# Altium PCB PCB1.PcbDoc
Units mm, origin at the board's own origin, x right, y up, seen from the top; angles counter-clockwise.
Board outline 39.12 x 20 mm, 2 copper layers (Top Layer, Bottom Layer); 40 components, 0 nets, 201 pads, 57 vias.
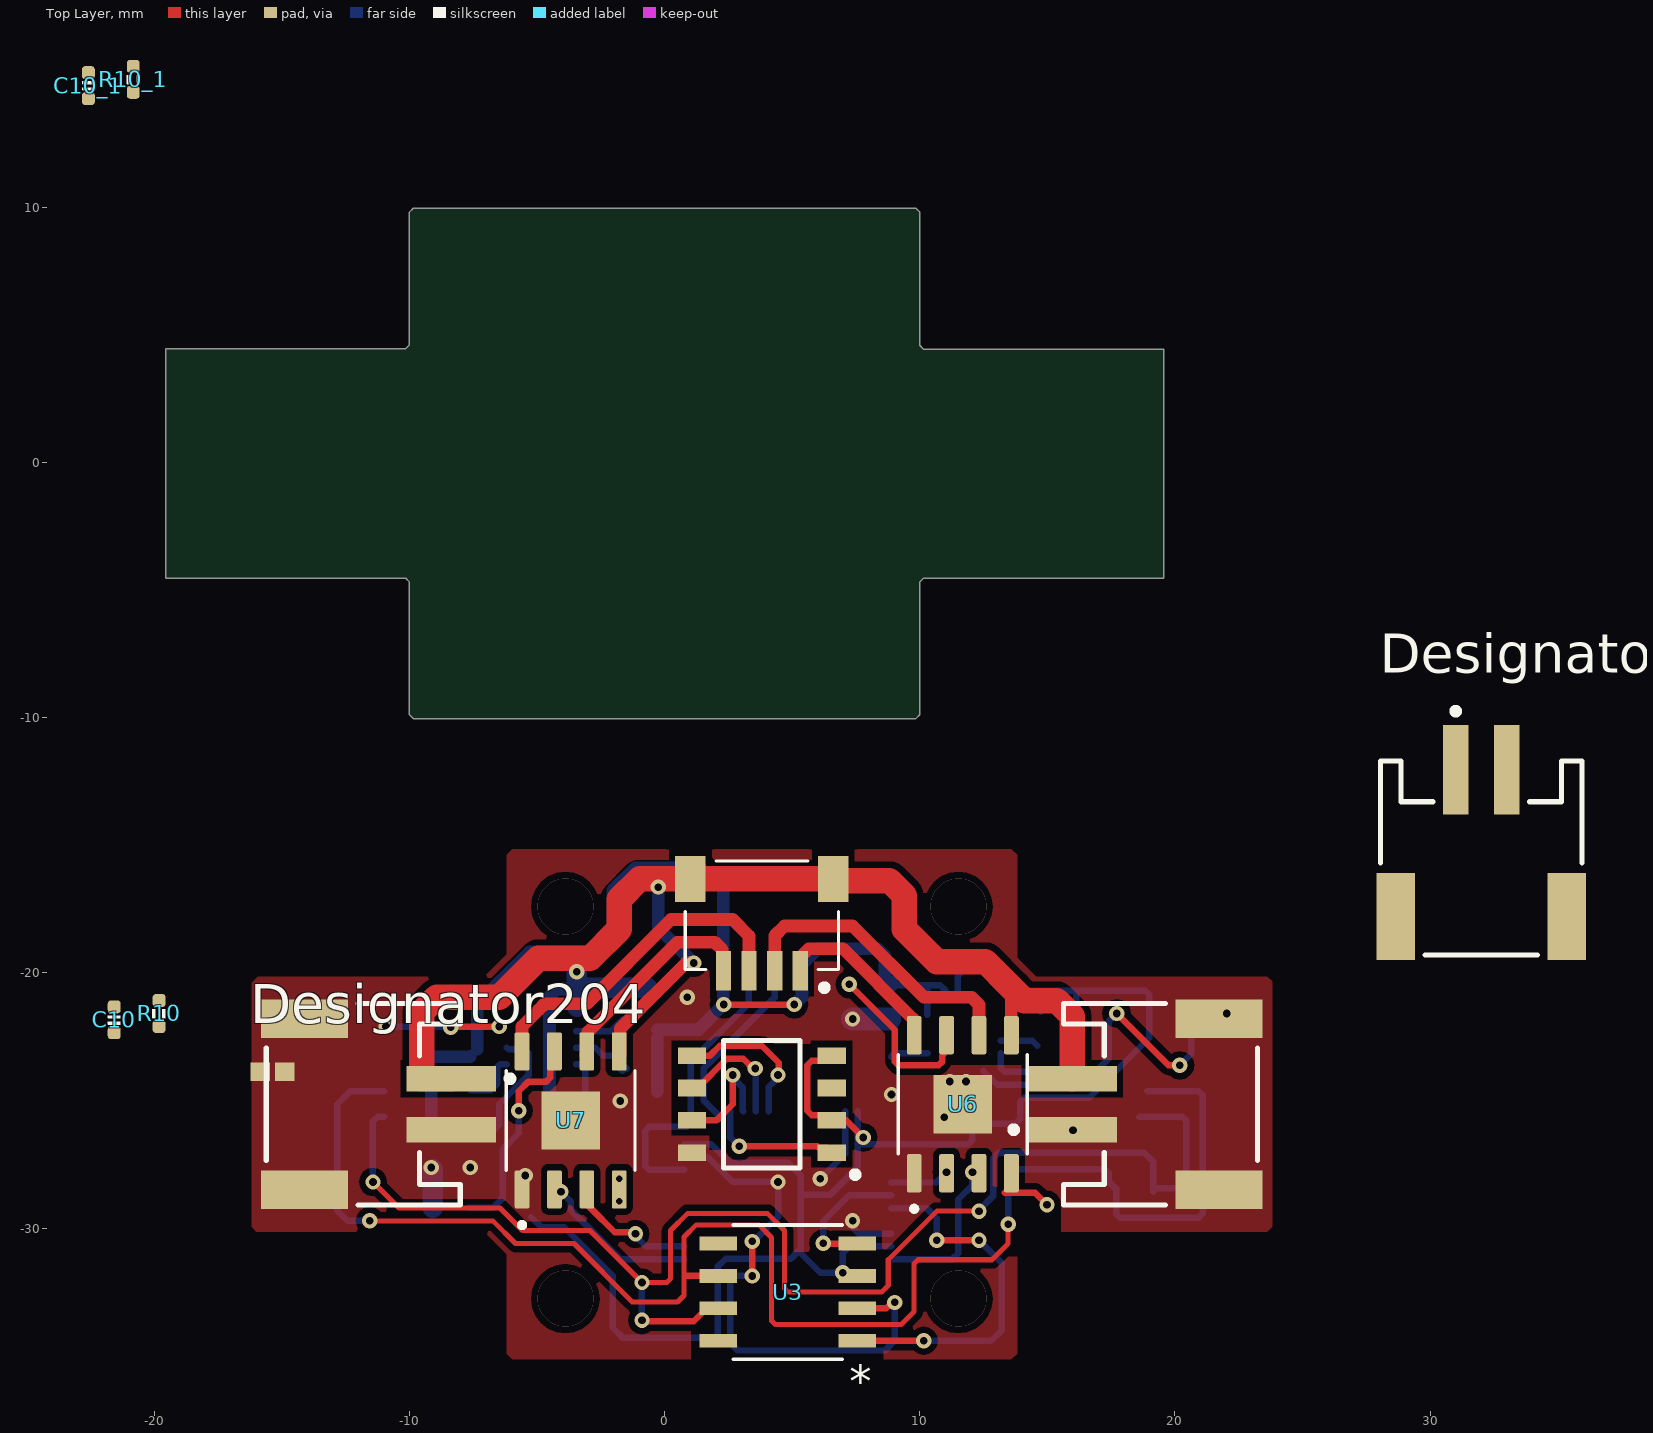
[diagram p0: Top Layer view]
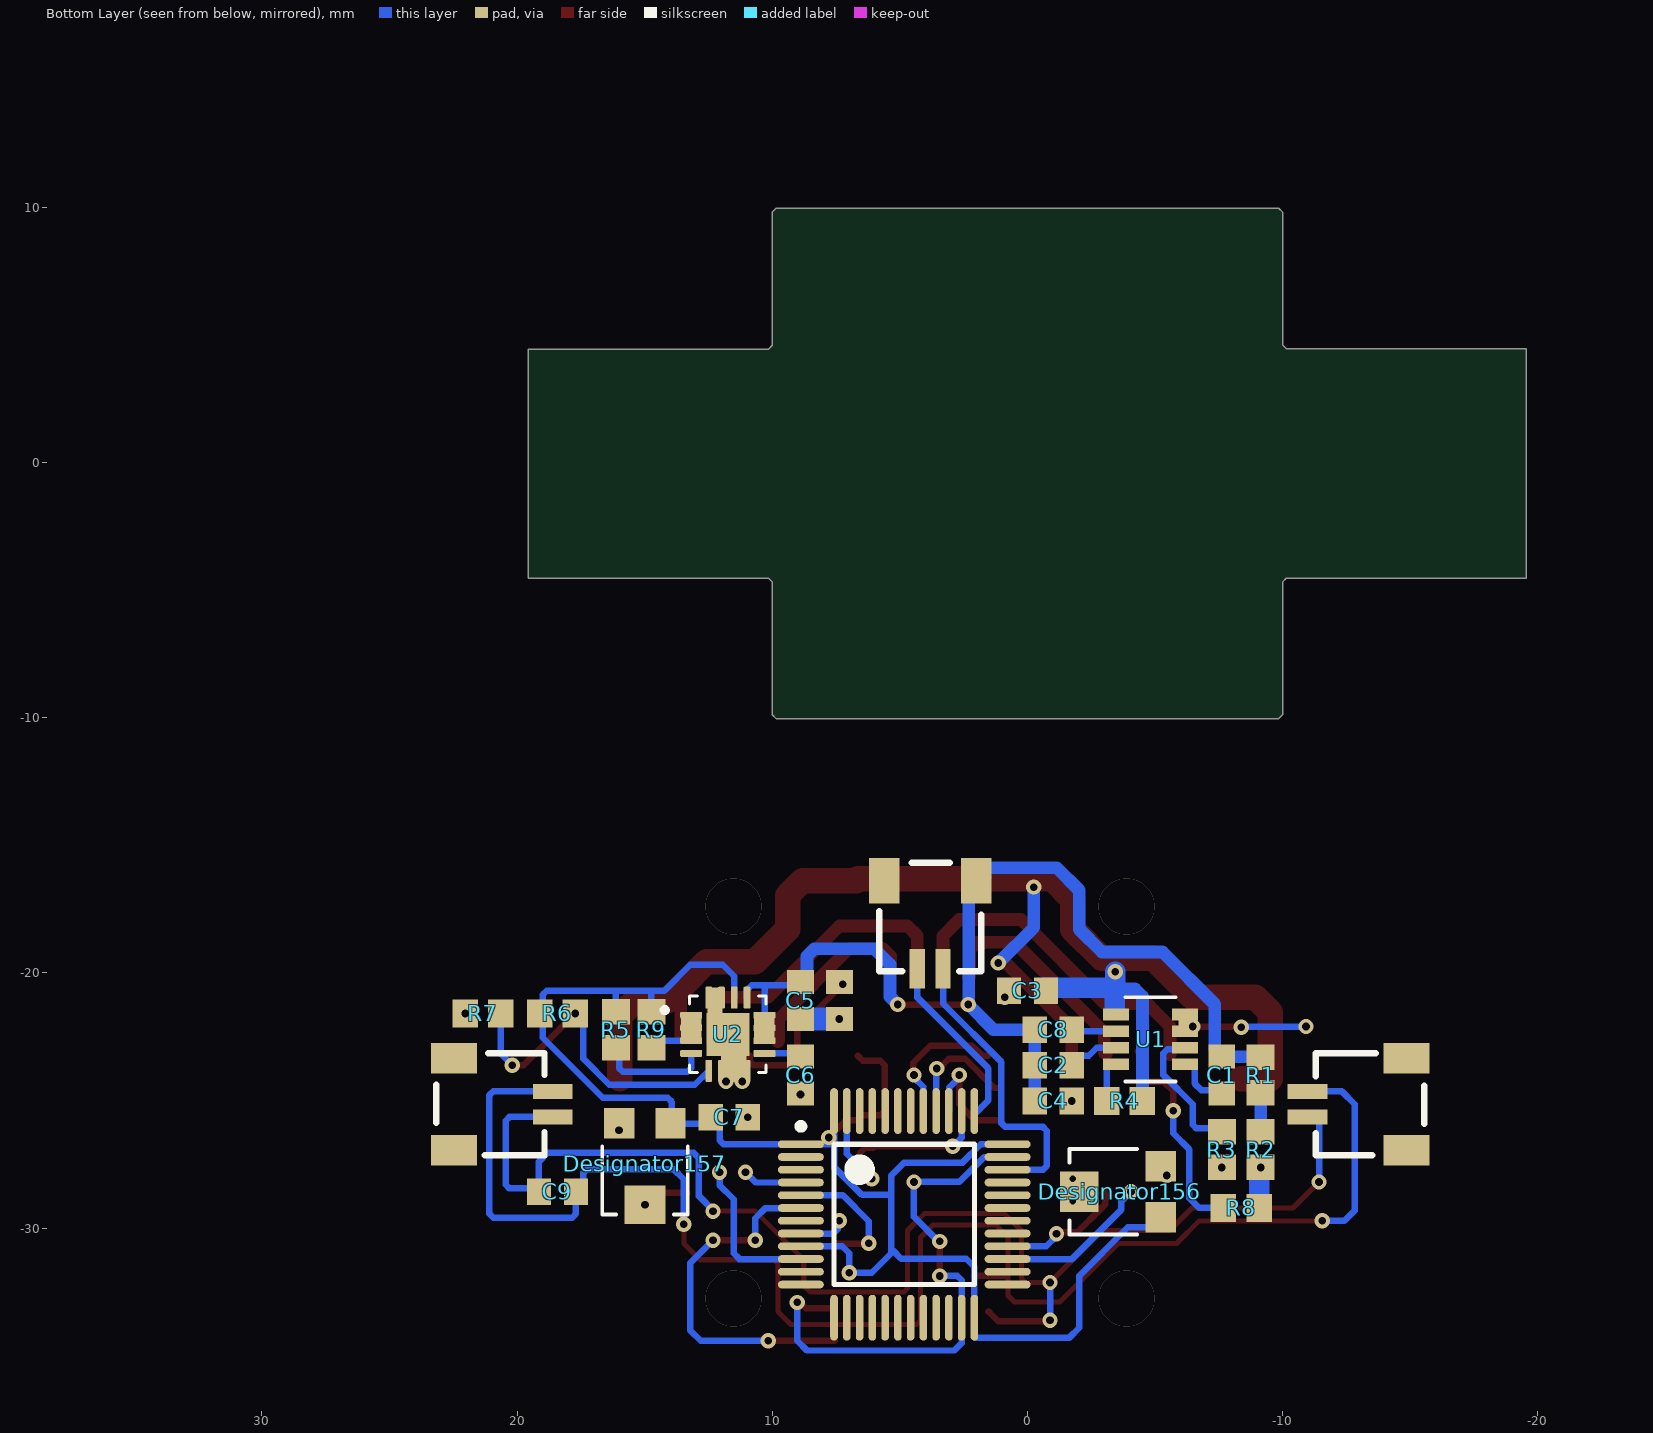
[diagram p1: Bottom Layer view, seen from below]

## Layer stack, top to bottom
Top Solder: solder mask 0.0102, Solder Resist, Dk 3.5
Top Layer: signal copper 0.0356
Dielectric 1: dielectric 0.32, FR-4, Dk 4.8
Bottom Layer: signal copper 0.0356
Bottom Solder: solder mask 0.0102, Solder Resist, Dk 3.5

## Board outline
-10,-9.884 -10,-4.682 -10.149,-4.533 -19.558,-4.533 -19.558,4.467 -10.149,4.467 -10,4.616 -10,9.818 -9.851,9.967 9.851,9.967 10,9.818 10,4.594 10.149,4.445 19.558,4.445 19.558,-4.533 10.149,-4.533 10,-4.682 10,-9.884 9.851,-10.033 -9.851,-10.033

## Design rules (kind name [scope] priority, off if disabled: settings)
Clearance [All] p1: gap=0.254 ignorepadtopadclearanceinfootprint=FALSE except(0: Arc-Hole Track-Hole SMDPad-Hole THPad-Hole Via-Hole Fill-Hole Poly-Hole Region-Hole Text-Hole)
PolygonConnect [All] p1: connectstyle=Relief reliefconductorwidth=0.254 reliefentries=4 polygonreliefangle="90 Angle" airgapwidth=0.254
RoutingVias [All] p1: holewidth=0.711 width=1.27 viastyle="Through Hole" minholewidth=0.1 minwidth=0.1 maxholewidth=5 maxwidth=5
SolderMaskExpansion [All] p1: expansion=0.102 istentingtop=FALSE
Width [All] p1: maxlimit=5 minlimit=0.254 preferedwidth=0.254
30 further rules are at their usual default settings.

## Components (designator, comment, footprint, x,y, rotation, side; value= is the part's Value field where it differs from the comment)
C1 "12pF" CAPC1608X90X35ML10T15 -7.62,-24.003 r90 bottom
C2 "10nF" CAPC1608X90X35ML10T15 -1.016,-23.622 r0 bottom
C3 "100uF" CAPC1608X90X35ML10T15 0,-20.701 r180 bottom
C4 "100uF" CAPC1608X90X35ML10T15 -1.016,-25.019 r0 bottom
C5 "10uF" CAPC1608X90X35ML10T15 8.89,-21.082 r90 bottom
C6 "3.3nF" CAPC1608X90X35ML10T15 8.89,-24.003 r90 bottom
C7 "22uF" CAPC1608X90X35ML10T15 11.684,-25.654 r0 bottom
C8 "12pF" CAPC1608X90X35ML10T15 -1.016,-22.225 r180 bottom
C9 "100uF" CAPC1608X90X35ML10T15 18.415,-28.575 r0 bottom
C10 "10uF" CAP_0402 -21.571,-21.838 r270 top value=0.1u
C10_1 "10uF" CAP_0402 -22.584,14.771 r270 top value=0.1u
Designator156 "Comment" EVM-3ESX50B14_PAN -3.683,-28.575 r90 bottom
Designator157 "Comment" EVM-3ESX50B14_PAN 14.986,-27.432 r0 bottom
Designator204 "Comment" CAPC1005X55X30ML05T10 -15.367,-23.876 r0 top
Designator222 "Comment" "JST- S2B-PH-SM4-TB(LF)(SN)-2_V" 32.004,-15.494 r0 top
R1 "110K" RESC1608X55X30ML20T20 -9.144,-24.003 r90 bottom
R2 "15K" RESC1608X55X30ML20T20 -9.144,-26.924 r90 bottom
R3 "47K" RESC1608X55X30ML20T20 -7.62,-26.924 r90 bottom
R4 "47K" RESC1608X55X30ML20T20 -3.81,-25.019 r180 bottom
R5 "100K" RESC1608X55X30ML20T20 16.129,-22.225 r270 bottom
R6 "750K" RESC1608X55X30ML20T20 18.415,-21.59 r180 bottom
R7 "240K" RESC1608X55X30ML20T20 21.336,-21.59 r180 bottom
R8 "240K" RESC1608X55X30ML20T20 -8.382,-29.21 r180 bottom
R9 "100K" RESC1608X55X30ML20T20 14.732,-22.225 r270 bottom
R10 "0R" RES_0402 -19.812,-21.59 r90 top value=22R
R10_1 "0R" RES_0402 -20.825,15.019 r90 top value=22R (schematic designator R10)
U1 "SY8303AIC" TSOT_303AIC_SGY -4.826,-22.606 r0 bottom
U2 "TLV62130RGTR" QFN50P300X300X100-17N 11.739,-22.407 r180 bottom
U3 "TJA1051T31J" SO8_SOT96-1_NXP 4.826,-32.512 r180 top
U5 "MT6816" SOIC127P600X175-8N-8-V 3.81,-25.146 r180 top
U6 "TB67H450FNG,EL" SOIC127P599X175-9N 11.684,-25.146 r90 top
U7 "TB67H450FNG,EL" SOIC127P599X175-9N -3.683,-25.781 r90 top
? "Comment" JST_SM04B-SRSS-TB(LF)(SN) 3.81,-20.193 r180 top
? "Comment" "JST- S2B-PH-SM4-TB(LF)(SN)-2_V" -11.811,-25.146 r270 top
? "Comment" "JST- S2B-PH-SM4-TB(LF)(SN)-2_V" 19.431,-25.146 r90 top
? "Comment" SM02B-SRSS-TB(LF)(SN)#1 -12.954,-25.146 r90 bottom
? "Comment" SM02B-SRSS-TB(LF)(SN)#1 20.574,-25.146 r270 bottom
? "Comment" LQFP48_N 4.826,-29.464 r180 bottom
? "22uF" CAPC1608X90X35ML10T15 7.366,-21.082 r90 bottom
? "Comment" SM02B-SRSS-TB(LF)(SN)#2 3.81,-18.288 r0 bottom

## Footprints (in the part's own frame and the unit in brackets; to place one, negate y for a bottom-side part, rotate by r counter-clockwise, add the part's x,y. Pads: shape width x height; smd on the part's side, far side on the other; paste and mask are expansions set on the pad)
CAP_0402 [mil]
  rrect50% 20x20 smd: 1(-20,0) 2(20,0)
  silkscreen extent -7,-9 7,9, body extent -20,-10 20,10, height 20
CAPC1005X55X30ML05T10 [mm] "Chip Capacitor, 2-Leads, Body 1.00x0.50mm, IPC Low Density"
  rect 0.76x0.72 smd: 1(-0.48,0) 2(0.48,0)
  body extent -0.53,-0.28 0.53,0.27, height 0.55
CAPC1608X90X35ML10T15 [mm] "Chip Capacitor, 2-Leads, Body 1.60x0.80mm, IPC Low Density"
  rect 0.95x1.05 smd: 1(-0.725,0) 2(0.725,0)
  body extent -0.85,-0.45 0.85,0.45, height 0.9
EVM-3ESX50B14_PAN [mil]
  rect 47x47 smd paste+0 mask+0: 1(-39.38,-60.75) 3(39.37,-60.75)
  rect 62.99x59.06 smd paste+0 mask+0: 2(0,65)
  silkscreen extent -66,-25 66,80
"JST- S2B-PH-SM4-TB(LF)(SN)-2_V" [mm] "SMD, 2-Leads, Body 7.9x7.6mm, Pitch 2mm"
  rect 1x3.5 smd: 1(-1,3.45) 2(1,3.45)
  rect 1.5x3.4 smd: MP1(-3.35,-2.3) MP2(3.35,-2.3)
  silkscreen extent -3.95,-3.8 3.95,5.87, body extent -3.95,-3.8 3.95,4.8, height 5.6
JST_SM04B-SRSS-TB(LF)(SN) [mm]
  rect 0.6x1.55 smd: 1(-1.5,-0.277) 2(-0.5,-0.277) 3(0.5,-0.277) 4(1.5,-0.277)
  rect 1.2x1.8 smd: S1(-2.8,-3.875) S2(2.8,-3.875)
  silkscreen extent -3,-4.57 3,0.48
LQFP48_N [mm] "Thin QFP, 48-Leads, Body 7x7mm, Pitch 0.5mm, IPC Medium Density"
  oval 1.8x0.3 smd: 1(-4.05,2.75) 2(-4.05,2.25) 3(-4.05,1.75) 4(-4.05,1.25) 5(-4.05,0.75) 6(-4.05,0.25) 7(-4.05,-0.25) 8(-4.05,-0.75) 9(-4.05,-1.25) 10(-4.05,-1.75) 11(-4.05,-2.25) 12(-4.05,-2.75) 25(4.05,-2.75) 26(4.05,-2.25) 27(4.05,-1.75) 28(4.05,-1.25) 29(4.05,-0.75) 30(4.05,-0.25) 31(4.05,0.25) 32(4.05,0.75) 33(4.05,1.25) 34(4.05,1.75) 35(4.05,2.25) 36(4.05,2.75)
  oval 0.3x1.8 smd: 13(-2.75,-4.05) 14(-2.25,-4.05) 15(-1.75,-4.05) 16(-1.25,-4.05) 17(-0.75,-4.05) 18(-0.25,-4.05) 19(0.25,-4.05) 20(0.75,-4.05) 21(1.25,-4.05) 22(1.75,-4.05) 23(2.25,-4.05) 24(2.75,-4.05) 37(2.75,4.05) 38(2.25,4.05) 39(1.75,4.05) 40(1.25,4.05) 41(0.75,4.05) 42(0.25,4.05) 43(-0.25,4.05) 44(-0.75,4.05) 45(-1.25,4.05) 46(-1.75,4.05) 47(-2.25,4.05) 48(-2.75,4.05)
  silkscreen extent -4.18,-2.75 2.75,3.57, body extent -3.5,-3.5 3.5,3.5, height 1.6
QFN50P300X300X100-17N [mm]
  rrect25% 0.86x0.26 smd: 1(-1.435,0.75) 2(-1.435,0.25) 3(-1.435,-0.25) 4(-1.435,-0.75) 9(1.435,-0.75) 10(1.435,-0.25) 11(1.435,0.25) 12(1.435,0.75)
  rrect25% 0.26x0.86 smd: 5(-0.75,-1.435) 6(-0.25,-1.435) 7(0.25,-1.435) 8(0.75,-1.435) 13(0.75,1.435) 14(0.25,1.435) 15(-0.25,1.435) 16(-0.75,1.435)
  rect 1.68x1.68 smd paste-2: 17(0,0)
  round 0.4 smd mask+0: 18(0,0) 19(-0.58,0.58) 20(0.58,0.58) 21(-0.58,-0.58) 22(0.58,-0.58)
  silkscreen extent -2.57,-1.5 1.5,1.5
RES_0402 [mil]
  rrect50% 20x20 smd: 1(-20,0) 2(20,0)
  silkscreen extent -7,-10 7,10, body extent -20,-10 20,10, height 14
RESC1608X55X30ML20T20 [mm] "Chip Resistor, 2-Leads, Body 1.60x0.80mm, IPC Low Density"
  rect 1x1.1 smd: 1(-0.7,0) 2(0.7,0)
  body extent -0.9,-0.5 0.9,0.5, height 0.55
SM02B-SRSS-TB(LF)(SN)#1 [mm]
  rect 0.6x1.55 smd: 1(-0.5,1.975) 2(0.5,1.975)
  rect 1.2x1.8 smd: 3(-1.8,-1.9) 4(1.8,-1.9)
  silkscreen extent -2,-2.6 2,1.65
SM02B-SRSS-TB(LF)(SN)#2 [mm]
  rect 0.6x1.55 smd: 1(-0.5,1.543) 2(0.5,1.543)
  rect 1.2x1.8 smd: 3(-1.8,-1.9) 4(1.8,-1.9)
  silkscreen extent -2,-2.6 2,1.65
SO8_SOT96-1_NXP [mil]
  rect 57.5x21 smd paste+0 mask+0: 1(-107.25,75) 2(-107.25,25) 3(-107.25,-25) 4(-107.25,-75) 5(107.25,-75) 6(107.25,-25) 7(107.25,25) 8(107.25,75)
  silkscreen extent -84,-104 84,104, body extent -122,-99 122,99, height 69
SOIC127P599X175-9N [mm]
  rrect25% 1.5x0.58 smd: 1(-2.705,1.905) 2(-2.705,0.635) 3(-2.705,-0.635) 4(-2.705,-1.905) 5(2.705,-1.905) 6(2.705,-0.635) 7(2.705,0.635) 8(2.705,1.905)
  rect 2.285x2.285 smd paste-2: 9(0,0)
  silkscreen extent -4.2,-2.52 1.95,2.52, body extent -3,-2.45 3,2.45, height 1.75
SOIC127P600X175-8N-8-V [mm]
  rect 1.1x0.65 smd: 1(-2.74,1.905) 2(-2.74,0.635) 3(-2.74,-0.635) 4(-2.74,-1.905) 5(2.74,-1.905) 6(2.74,-0.635) 7(2.74,0.635) 8(2.74,1.905)
  silkscreen extent -3.79,-2.5 1.5,2.88, body extent -3,-2.5 3,2.5, height 1.75
TSOT_303AIC_SGY [mil]
  rect 39.5x18 smd paste+0 mask+0: 1(-53.25,38.38) 2(-53.25,12.8) 3(-53.25,-12.79) 4(-53.25,-38.38) 5(53.25,-38.38) 6(53.25,-12.79) 7(53.25,12.8) 8(53.25,38.38)
  silkscreen extent -38,-65 38,65, body extent -59,-60 59,60, height 43

## Part data
C1 C2 C3 C4 C5 C6 C7 C8 C9 ?: library part CMP-2006-02924-1, Manufacturer=Murata, PART NUMBER=GRM188R71H472KA01D
C10 C10_1: library part µçÈÝ-0402, "Capacitor"
R1 R2 R3 R4 R5 R6 R7 R8 R9: library part CMP-2000-00054-1, Manufacturer=Panasonic, PART NUMBER=ERA3AEB392V
R10: library part µç×è-0402, "Resistor"
R10_1: library part CMP-2000-00054-1
U1: "No Description Available", Mfr_Name=Silergy, RefDes=RefDes, Type=Type
U2: "3-17V 3A Step-Down Converter in 3x3 QFN Package 16-VQFN -40 to 85", Package="VQFN-16 Texas Instruments", Availability=Unavailable, DigiKey-Purchase-URL=https://snapeda.com/shop?store=DigiKey&id=423292, MF="Texas Instruments", Mouser-Purchase-URL=https://snapeda.com/shop?store=Mouser&id=423292, MP=TLV62130RGTR, Price=None, SnapEDA_Link=https://www.snapeda.com/parts/TLV62130RGTR/Texas%20Instruments/view-part/423292/?ref=snap, Texas_Instruments-Purchase-URL=https://snapeda.com/shop?store=Texas+Instruments&id=423292
U3: "No Description Available", Mfr_Name=NXP, RefDes=RefDes, Type=Type
U5: library part TLE5012B_E1000, "TLE5012B/TLI5012B Angular and Linear Position Sensor Evaluation Board Automotive", Package="SOIC-8 Infineon Technologies", Availability="In Stock", Check_prices=https://www.snapeda.com/parts/TLE5012B%20E1000/Infineon+Technologies/view-part/?ref=eda, MF="Infineon Technologies", MP="TLE5012B E1000", Price=None, SnapEDA_Link=https://www.snapeda.com/parts/TLE5012B%20E1000/Infineon+Technologies/view-part/?ref=snap
U6 U7: "- Motor Driver - - 8-HSOP", Package="SOIC-8 Toshiba Semiconductor and Storage", Availability="In Stock", Check_prices=https://www.snapeda.com/parts/TB67H450FNG,EL/Toshiba+Semiconductor+and+Storage/view-part/?ref=eda, MF="Toshiba Semiconductor and Storage", MP=TB67H450FNG,EL, Price=None, Purchase-URL=https://pricing.snapeda.com/search?q=TB67H450FNG,EL&ref=eda, SnapEDA_Link=https://www.snapeda.com/parts/TB67H450FNG,EL/Toshiba+Semiconductor+and+Storage/view-part/?ref=snap

## Free pads (board coordinates)
  rect 0.8x1 smd far side: 2(10.304,-22.157) 2(13.174,-22.157)
  rect 1x1 smd far side: 2(11.51,-23.622)
  rect 0.6x1 smd far side: 2(12.239,-21.069)
  rect 0.6x0.6 smd far side: 4(-6.223,-21.971)

## Via types
v1: diameter 0.6, hole 0.3, Top Layer to Bottom Layer, 51 vias
v2: diameter 2.2, hole 2.2, Top Layer to Bottom Layer, 4 vias
v3: diameter 0.5, hole 0.25, Top Layer to Bottom Layer, 2 vias

## Nets (pads, with @x,y where several pads share a name; then routed paths per layer and width w, separated by ;. In a path a pad name is that pad's centre, name@x,y a point inside that pad or via, vN(x,y) a via of type N, cw(c..) or ccw(c..) an arc to the next point about the centre after c; other vN are vias at no path point)
pads on no net: ?.1 ?.2 ?.3 ?.4 ?.5 ?.6 ?.7 ?.8 ?.9 ?.10 ?.11 ?.12 ?.13 ?.14 ?.15 ?.16 ?.17 ?.18 ?.19 ?.20 ?.21 ?.22 ?.23 ?.24 ?.25 ?.26 ?.27 ?.28 ?.29 ?.30 ?.31 ?.32 ?.33 ?.34 ?.35 ?.36 ?.37 ?.38 ?.39 ?.40 ?.41 ?.42 ?.43 ?.44 ?.45 ?.46 ?.47 ?.48 ?.MP1 ?.MP2 ?.S1 ?.S2 C1.1 C1.2 C2.1 C2.2 C3.1 C3.2 C4.1 C4.2 C5.1 C5.2 C6.1 C6.2 C7.1 C7.2 C8.1 C8.2 C9.1 C9.2 C10.1 C10.2 C10_1.1 C10_1.2 Designator156.1 Designator156.2 Designator156.3 Designator157.1 Designator157.2 Designator157.3 Designator204.1 Designator204.2 Designator222.1 Designator222.2 Designator222.MP1 Designator222.MP2 R1.1 R1.2 R2.1 R2.2 R3.1 R3.2 R4.1 R4.2 R5.1 R5.2 R6.1 R6.2 R7.1 R7.2 R8.1 R8.2 R9.1 R9.2 R10.1 R10.2 R10_1.1 R10_1.2 U1.1 U1.2 U1.3 U1.4 U1.5 U1.6 U1.7 U1.8 U2.1 U2.2 U2.3 U2.4 U2.5 U2.6 U2.7 U2.8 U2.9 U2.10 U2.11 U2.12 U2.13 U2.14 U2.15 U2.16 U2.17 U2.18 U2.19 U2.20 U2.21 U2.22 U3.1 U3.2 U3.3 U3.4 U3.5 U3.6 U3.7 U3.8 U5.1 U5.2 U5.3 U5.4 U5.5 U5.6 U5.7 U5.8 U6.1 U6.2 U6.3 U6.4 U6.5 U6.6 U6.7 U6.8 U6.9 U7.1 U7.2 U7.3 U7.4 U7.5 U7.6 U7.7 U7.8 U7.9
copper on no net: | length 485
  Top Layer w0.2: v1(-11.557,-29.718) -6.731,-29.718 -5.842,-30.607 -3.556,-30.607 -1.27,-32.893 0.508,-32.893 0.762,-32.639 0.762,-31.877 0.762,-30.353 1.242,-29.873 3.698,-29.873 4.191,-30.366 4.191,-33.633 4.34,-33.782 9.271,-33.782 9.779,-33.274 9.779,-31.391 9.928,-31.242 12.827,-31.242 13.462,-30.607 v1(13.462,-29.845) ; v1(-11.43,-28.194) -10.414,-29.21 -6.455,-29.21 -5.566,-30.099 -2.921,-30.099 v1(-0.889,-32.131) 0.083,-32.131 0.232,-31.982 0.232,-30.096 0.905,-29.423 4.023,-29.423 4.699,-30.099 4.699,-32.363 4.848,-32.512 8.5,-32.512 8.763,-32.249 8.763,-31.242 10.668,-29.337 v1(12.319,-29.337)
  Top Layer w0.254: v1(-8.386,-22.129) -8.371,-22.114 -6.493,-22.114 v1(-6.477,-22.098) ; v1(-5.715,-25.4) -5.713,-25.398 -5.713,-24.636 -5.334,-24.257 -4.63,-24.257 -4.481,-24.108 -4.481,-23.239 -4.318,-23.076 ; -3.048,-28.613 -3.048,-29.073 -2.885,-29.236 -1.951,-30.169 -1.2,-30.169 v1(-1.143,-30.226) ; v1(-0.889,-33.613) -0.847,-33.655 1.143,-33.655 1.499,-33.299 1.499,-33.287 1.511,-33.274 1.524,-33.274 ; 0.889,-31.877 2.102,-31.877 ; 1.07,-25.781 2.032,-25.781 2.667,-25.146 v1(2.667,-24.003) ; 1.07,-24.511 1.295,-24.511 2.438,-23.368 2.794,-23.368 3.081,-23.368 3.462,-23.749 v1(3.556,-23.749) ; 1.524,-23.241 1.778,-23.241 2.159,-22.86 3.81,-22.86 4.471,-23.521 4.471,-23.977 v1(4.445,-24.003) ; v1(2.313,-21.241) v1(5.08,-21.241) ; v1(2.921,-26.797) 5.978,-26.797 6.034,-26.853 6.352,-26.853 6.55,-27.051 ; v1(3.429,-31.877) v1(3.429,-30.523) ; v1@6.223,-30.607 7.55,-30.607 ; 6.655,-23.241 6.457,-23.439 5.771,-23.439 5.588,-23.622 5.588,-25.4 5.771,-25.583 6.457,-25.583 6.655,-25.781 7.114,-25.781 v1(7.781,-26.448) ; v1(7.239,-20.447) 7.747,-20.955 9.017,-22.225 9.017,-23.473 9.166,-23.622 10.737,-23.622 10.886,-23.473 10.886,-23.239 10.922,-23.203 ; 7.55,-34.417 v1(10.16,-34.417) ; 7.55,-33.147 8.69,-33.147 8.923,-32.914 v1(9.017,-32.914) ; v1(10.668,-30.48) v1(12.319,-30.48) ; 13.335,-28.613 14.516,-28.613 v1(14.986,-29.083) ; 13.525,-20.511 13.589,-20.574 ; v1(17.715,-21.59) 19.745,-23.62 20.191,-23.62 v1(20.193,-23.622)
  Top Layer w0.5: -5.588,-23.203 -5.588,-22.098 -4.943,-21.453 -4.699,-21.209 -3.048,-21.209 0.254,-17.907 2.667,-17.907 3.31,-18.55 3.31,-20.193 ; -3.088,-23.199 -3.008,-23.119 -3.008,-22.312 0.508,-18.796 1.967,-18.796 2.26,-19.089 2.26,-20.143 2.31,-20.193 ; -1.778,-23.249 -1.738,-23.209 -1.738,-22.185 0.836,-19.611 v1(1.143,-19.611) ; 4.318,-19.685 4.318,-18.542 4.699,-18.161 7.366,-18.161 10.16,-20.955 12.026,-20.955 12.319,-21.248 12.319,-22.733 ; 5.31,-19.916 5.36,-19.866 5.36,-19.343 5.653,-19.05 6.985,-19.05 9.739,-21.804 9.739,-22.655 9.779,-22.695 ; 13.589,-22.441 13.589,-20.574
  Top Layer w1: -8.361,-24.146 -9.525,-24.146 -9.525,-21.541 -8.939,-20.955 -6.477,-20.955 -4.953,-19.431 -2.921,-19.431 -1.778,-18.288 -1.778,-17.113 -0.983,-16.318 1.01,-16.318 6.61,-16.318 6.645,-16.318 6.71,-16.383 8.812,-16.383 9.398,-16.969 9.398,-18.288 10.668,-19.558 12.573,-19.558 13.525,-20.511 ; 13.589,-20.574 14.097,-21.082 15.367,-21.082 15.981,-21.696 15.981,-24.146
  Bottom Layer w0.254: v1(-11.557,-29.718) -12.424,-29.718 -12.827,-29.315 -12.827,-25.146 -12.327,-24.646 -10.979,-24.646 ; v1(-11.43,-28.194) -11.43,-25.819 -11.257,-25.646 -10.979,-25.646 ; v1(-10.922,-22.098) -10.906,-22.114 -8.402,-22.114 v1(-8.386,-22.129) ; v1(-9.144,-27.624) v1@-9.082,-27.686 ; -7.682,-29.21 -6.731,-29.21 -6.674,-29.153 -6.35,-28.829 -6.35,-26.924 -5.715,-26.289 v1(-5.715,-25.4) ; -7.62,-26.097 -6.626,-26.097 -6.477,-25.948 -6.477,-25.146 -5.334,-24.003 -5.334,-23.145 -5.483,-22.996 -6.113,-22.996 -6.179,-22.931 ; -7.62,-24.601 -6.821,-24.601 -6.553,-24.333 -6.553,-23.683 -6.452,-23.581 -6.179,-23.581 ; -5.226,-29.575 -4.829,-29.972 -3.937,-29.972 -2.032,-31.877 -2.032,-33.909 -1.651,-34.29 2.032,-34.29 ; v1(-4.064,-28.575) -3.688,-28.951 -3.688,-29.271 -1.746,-31.214 0.776,-31.214 ; -3.473,-23.581 -3.212,-23.581 -3.11,-23.683 -3.11,-25.019 ; -3.473,-22.931 -2.723,-22.931 -2.402,-23.252 -1.857,-23.252 ; -3.473,-22.281 -2.089,-22.281 -1.656,-21.848 -1.656,-21.844 ; -1.857,-23.633 -1.649,-23.841 ; -1.649,-23.587 -1.487,-23.749 ; v1(-1.143,-30.226) -1.143,-30.313 -0.742,-30.714 0.776,-30.714 ; v1(-0.889,-33.613) v1(-0.889,-32.131) ; 0.776,-27.714 -0.613,-27.714 -0.762,-27.565 -0.762,-26.184 -0.613,-26.035 0.867,-26.035 1.016,-25.886 1.016,-23.495 3.302,-21.209 3.302,-19.9 ; 0.776,-27.214 0.785,-27.223 1.696,-27.223 2.667,-28.194 v1(4.445,-28.194) 4.445,-29.557 3.479,-30.523 v1(3.429,-30.523) ; 0.776,-26.714 1.822,-26.714 2.54,-27.432 4.826,-27.432 5.334,-27.94 5.334,-28.702 ; 2.055,-34.29 2.076,-34.269 2.076,-33.514 2.076,-33.295 ; 2.076,-33.253 2.076,-31.518 2.394,-31.2 4.951,-31.2 5.249,-30.903 5.334,-30.817 ; 2.076,-25.541 1.524,-24.989 1.524,-23.749 4.308,-20.965 4.308,-19.706 4.31,-19.704 ; 2.576,-25.414 2.576,-26.452 v1(2.921,-26.797) ; v1(2.667,-24.003) 2.667,-24.097 3.067,-24.497 3.067,-25.405 3.076,-25.414 ; v1(3.429,-31.877) 2.745,-31.877 2.576,-32.046 2.576,-33.514 2.576,-34.508 2.866,-34.798 8.636,-34.798 9.017,-34.417 v1(9.017,-32.914) ; v1(3.556,-23.749) 3.576,-23.769 3.576,-25.414 ; 4.076,-25.414 4.085,-25.405 4.085,-24.457 4.445,-24.097 v1(4.445,-24.003) ; v1(6.096,-28.067) 7.076,-27.087 7.076,-25.414 ; v1(6.213,-30.596) 6.213,-29.728 7.227,-28.714 8.876,-28.714 ; v1(7.366,-29.718) 7.432,-29.784 7.432,-30.042 7.604,-30.214 8.876,-30.214 ; 7.576,-25.414 7.576,-26.448 7.576,-26.723 7.576,-27.603 6.477,-28.702 5.334,-28.702 ; v1@7.673,-26.723 8.867,-26.723 8.876,-26.714 11.912,-26.714 12.061,-26.565 12.061,-26.052 12.205,-25.908 13.716,-25.908 ; 8.636,-20.484 8.89,-20.484 10.287,-20.484 ; 8.853,-21.844 8.89,-21.807 ; 8.876,-31.214 11.284,-31.214 11.51,-30.988 11.51,-28.876 12.065,-28.321 v1(12.065,-27.813) ; 8.876,-30.714 7.259,-30.714 6.985,-30.988 v1(6.985,-31.75) 6.096,-31.75 5.334,-30.988 5.334,-30.817 ; 8.876,-29.214 10.265,-29.214 10.668,-29.617 v1(10.668,-30.48) ; 8.876,-28.214 10.302,-28.214 10.307,-28.214 10.648,-28.214 v1(11.049,-27.813) ; 8.89,-23.278 9.011,-23.157 10.304,-23.157 ; v1(10.16,-34.417) 12.805,-34.417 13.208,-34.014 13.208,-31.369 v1(12.319,-30.48) ; 10.287,-21.64 10.287,-20.484 ; 10.989,-20.955 10.989,-20.672 10.801,-20.484 10.287,-20.484 ; 11.489,-20.972 11.489,-20.134 11.938,-19.685 13.208,-19.685 14.224,-20.701 14.732,-20.701 ; v1(12.319,-29.337) 12.319,-29.299 12.871,-28.747 12.871,-27.261 13.081,-27.051 18.796,-27.051 19.14,-27.395 19.14,-28.575 ; 12.489,-23.842 13.031,-24.384 16.383,-24.384 17.399,-23.368 17.399,-21.906 v1@17.588,-21.717 ; 13.174,-23.157 13.174,-23.727 13.323,-23.876 15.853,-23.876 16.002,-23.727 16.002,-23.052 ; 13.174,-22.657 14.411,-22.657 14.605,-22.851 ; v1(13.462,-29.845) 13.462,-28.089 13.865,-27.686 17.251,-27.686 17.399,-27.835 17.399,-28.177 17.67,-28.448 17.69,-28.448 17.69,-29.442 17.839,-29.591 20.933,-29.591 21.082,-29.442 21.082,-24.787 20.933,-24.638 18.923,-24.638 ; 13.748,-25.908 13.929,-25.727 13.929,-25.06 14.097,-24.892 16.637,-24.892 18.988,-22.541 18.988,-20.85 18.839,-20.701 16.129,-20.701 ; 14.732,-21.525 14.732,-20.701 ; 16.129,-21.525 16.129,-20.701 ; 18.599,-25.646 20.298,-25.646 20.447,-25.795 20.447,-28.299 20.298,-28.448 19.177,-28.448 ; v1(20.193,-23.622) 20.193,-23.616 20.636,-23.173 20.636,-21.59 ; 5.334,-30.817 5.334,-28.702 ; 14.732,-20.701 16.129,-20.701
  Bottom Layer w0.5: -9.144,-26.097 -9.144,-24.576 ; -9.106,-23.278 -9.094,-23.291 -7.633,-23.291 -7.62,-23.278 ; -7.345,-22.987 -7.345,-21.227 -5.295,-19.177 -2.921,-19.177 -2.032,-18.288 -2.032,-16.764 -1.143,-15.875 1.401,-15.875 ; -4.51,-25.019 -4.51,-20.924 -4.217,-20.631 -3.486,-20.631 -3.448,-20.593 ; -0.291,-24.662 -0.291,-23.622 -0.291,-22.573 ; -0.291,-22.225 1.329,-22.225 v1(2.313,-21.241) 2.293,-21.222 2.293,-16.671 2.01,-16.388 ; v1(-0.254,-16.637) -0.254,-18.214 v1(1.143,-19.611) ; 1.651,-16.256 1.897,-16.502 ; v1(5.08,-21.241) 5.387,-20.934 5.387,-19.671 6.008,-19.05 8.343,-19.05 8.636,-19.343 8.636,-20.357 ; 8.89,-20.484 8.89,-20.357
  Bottom Layer w0.8: -9.082,-29.21 v1@-9.082,-27.686 ; -3.448,-20.593 v1(-3.448,-19.958) ; -3.429,-21.336 -3.429,-20.574 -1.269,-20.574 -1.267,-20.576 -0.678,-20.576 ; 8.816,-21.807 8.853,-21.844
  Bottom Layer w0.9: v1(7.366,-21.807) 8.816,-21.807
  other v1: -5.461,-27.94 -7.62,-27.624 16.002,-26.162 10.959,-25.654 -1.741,-25.019 8.89,-24.765 11.176,-24.257 11.811,-24.257 22.036,-21.59 0.889,-20.955
  other v2: -3.89,-32.766 11.51,-32.766 -3.89,-17.399 11.51,-17.399
  other v3: -1.778,-28.956 -1.778,-28.067

## Polygon pours and split planes (outlines as drawn)
no net on Top Layer "NONET_L01_P001" (solid, pour order 1): -16.002,-30.146 -16.176,-29.972 -16.19,-29.958 -16.19,-20.381 -15.955,-20.146 -7.065,-20.146 -6.19,-19.271 -6.19,-15.367 -5.969,-15.146 13.589,-15.146 13.81,-15.367 13.81,-19.398 14.558,-20.146 23.622,-20.146 23.81,-20.334 23.81,-29.958 23.622,-30.146 14.558,-30.146 13.81,-30.894 13.81,-34.925 13.589,-35.146 -5.969,-35.146 -6.19,-34.925 -6.19,-31.021 -7.065,-30.146

## Other copper
Top Layer:
  pour cut-out: 8.58,-35.645 8.58,-30.924 3.429,-30.924 3.08,-30.575 1.016,-32.639 1.016,-35.75 8.608,-35.75
  pour cut-out: 12.192,-21.082 12.192,-22.606 13.208,-23.622 15.494,-23.622 15.494,-21.59
  pour cut-out: 1.016,-31.369 4.699,-31.369 4.699,-33.836 3.552,-34.984 1.072,-34.984
  pour cut-out: 3.81,-22.806 5.7,-22.806 5.7,-25.669 5.334,-26.035 5.207,-25.908 4.191,-25.908
  pour cut-out: 15.536,-29.192 15.536,-30.311 14.732,-31.115 12.827,-31.115 12.827,-30.099 11.811,-29.083 12.281,-28.613 13.926,-28.613
  pour cut-out: 1.778,-23.876 1.778,-26.924 5.842,-26.924 6.114,-26.652 6.114,-23.439 2.215,-23.439
  pour cut-out: -4.097,-24.082 -4.096,-24.082 -3.266,-24.082 -3.266,-21.372 -3.302,-21.336 -3.429,-21.463 -5.207,-21.463
  pour cut-out: -8.89,-22.098 -6.14,-22.098 -5.588,-22.65 -5.713,-22.776 -5.713,-24.892 -9.017,-24.892
  pour cut-out: 13.981,-23.622 11.243,-23.622 11.049,-23.428 11.049,-21.209 12.7,-21.209 12.954,-21.463
  pour cut-out: 1.651,-16.764 1.651,-19.177 1.905,-19.431 9.779,-19.431 9.779,-17.35 9.105,-16.676
Bottom Layer:
  pour cut-out: 9.525,-27.178 10.16,-27.178 10.033,-27.305 10.033,-30.988 9.398,-30.988
  pour cut-out: 7.747,-31.115 7.747,-32.512 3.017,-32.512 2.558,-32.053 2.921,-31.69 2.921,-31.242
  pour cut-out: 9.779,-26.924 9.906,-27.051 12.827,-27.051 12.827,-28.321 12.573,-28.575 12.319,-28.321 9.652,-28.321
  pour cut-out: -6.096,-25.16 -6.223,-25.287 -6.223,-29.605 -1.27,-29.605 -0.762,-29.097 -0.762,-24.906
  pour cut-out: 12.695,-31.979 13.931,-31.979 13.97,-31.941 13.97,-29.273 10.033,-29.273 9.017,-30.29 9.017,-31.559
  pour cut-out: 19.939,-24.257 19.939,-23.368 20.828,-22.479 20.32,-21.971 18.161,-21.971 18.161,-23.368 17.399,-24.13
  pour cut-out: 15.431,-27.686 15.558,-27.813 17.78,-27.813 17.78,-30.48 16.891,-31.369 16.256,-30.734 15.24,-30.734
  pour cut-out: 10.795,-26.416 2.54,-26.416 2.413,-26.289 2.794,-25.908 2.794,-19.939 5.119,-19.939 6.008,-19.05 6.135,-19.177 7.747,-19.177 7.747,-20.193 11.303,-23.749

## Silkscreen, mask and mechanical layers (free items; w line width, h text height)
Mechanical 1:
  lines w0.2: -16.19,-29.958 -16.19,-20.381 -15.955,-20.146 -7.065,-20.146 -6.19,-19.271 -6.19,-15.367 -5.969,-15.146 13.589,-15.146 13.81,-15.367 13.81,-19.398 14.558,-20.146 23.622,-20.146 23.81,-20.334 23.81,-29.958 23.622,-30.146 14.558,-30.146 13.81,-30.894 13.81,-34.925 13.589,-35.146 -5.969,-35.146 -6.19,-34.925 -6.19,-31.021 -7.065,-30.146 -16.002,-30.146 -16.176,-29.972 -16.19,-29.958

## Text inside footprints (layer, text, board x,y; h text height)
U1: Bottom 3D Body "*" at -5.613,-22.784 h1.27 r180
U3: Top Overlay "*" at 8.122,-34.823 h1.27 r180; Top 3D Body "*" at 6.756,-33.668 h1.27 r180